# EAGLE board AVR32_PWM_breakout (EAGLE 5.06)
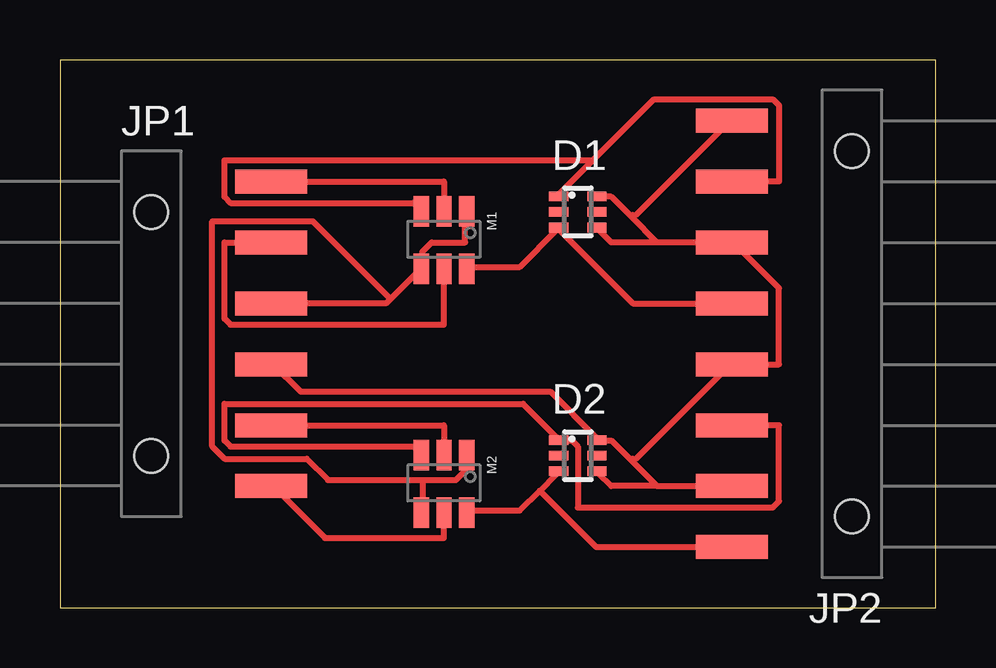
[diagram p0: board, top side]

Size 36.5 x 22.85 mm. Coordinates in mm from the lower left corner, seen from the top.
Outline: 0,0 36.5,0 36.5,22.85 0,22.85 0,0
Copper layers (1*16): Top 0.035mm / dielectric 1.5mm / Bottom 0.035mm
Design rules "Jacob": minimum track width 10mil, minimum drill 20mil, track to track 10mil, track to pad 10mil, pad to pad 10mil, via to via 10mil, smd to smd 10mil, copper to edge 10mil, drill to drill 10mil, minimum pad ring 12mil, minimum via ring 10mil, stop-mask expansion 4mil, vias tented up to drill 25mil, thermal gap 10mil

## Footprints (pad centres in the part's own frame; a part is rotated, then mirrored left to right if it is on the bottom)
SOT-363 = smd 0.4 x 0.8: 1 -0.65,-0.8; 2 0,-0.8; 3 0.65,-0.8; 4 0.65,0.8; 5 0,0.8; 6 -0.65,0.8
1X06-SMD = smd 1 x 3: 1 -6.35,5; 2 -3.81,5; 3 -1.27,5; 4 1.27,5; 5 3.81,5; 6 6.35,5 | hole 1.4: -5.08,0; 5.08,0
1X08-SMD = smd 1 x 3: 1 -6.35,5; 2 -3.81,5; 3 -1.27,5; 4 1.27,5; 5 3.81,5; 6 6.35,5; 7 8.89,5; 8 11.43,5 | hole 1.4: -5.08,0; 10.16,0
SC-74 = smd 0.635 x 1.27: 1 -0.45,-1.3; 2 0.5,-1.3; 3 1.45,-1.3; 4 1.45,1.1; 5 0.5,1.1; 6 -0.45,1.1

## Placement (x,y rotation side)
D1  BAT54JWSOT-363  [SOT-363]  21.59,16.51 270 top
D2  BAT54JWSOT-363  [SOT-363]  21.59,6.35 270 top
JP1  AVR32  [1X06-SMD]  3.81,11.43 270 top
JP2  PWM  [1X08-SMD]  33.02,8.89 90 top
M1  NUD3105DSC-74  [SC-74]  16.51,15.24 180 top
M2  NUD3105DSC-74  [SC-74]  16.51,5.08 180 top

## Library data of the parts
D1 D2 JP1 JP2 M1 M2 = haptic-inu

## Nets
GND: JP1.3 M1.1 M1.4 M2.1 M2.4
MTR1(-): D1.1 JP2.7 M1.3
MTR2(-): D1.3 JP2.5 M1.6
MTR3(-): D2.1 JP2.3 M2.3
MTR4(-): D2.3 JP2.1 M2.6
PWM2(33): JP1.2 M1.5
PWM3(34): JP1.1 M1.2
PWM4(41): JP1.6 M2.5
PWM6(46): JP1.5 M2.2
VDD3.3V: D1.4 D1.6 D2.4 D2.6 JP1.4 JP2.2 JP2.4 JP2.6 JP2.8

## Tracks (layer width: path | path; a pad name or v marks a point on that pad's centre or on a via)
GND
  Top 0.254: 15.11,5.33 15.11,4.06 M2.4 | 15.11,5.33 16.51,5.33 16.89,5.71 16.89,6.35 M2.1 | 13.78,12.89 13.59,12.7 JP1.3 | 13.78,12.89 14.99,14.1 M1.4 15.11,14.22 15.11,14.86 15.49,15.24 16.89,15.24 16.89,16.51 M1.1 | 15.11,5.33 11.18,5.33 10.29,6.22 6.86,6.22 6.35,6.73 6.35,16.13 10.54,16.13 13.78,12.89
MTR1(-)
  Top 0.254: 22.16,18.61 24.77,21.21 29.72,21.21 29.97,20.95 29.97,17.78 JP2.7 | 22.16,18.61 20.83,17.27 D1.1 | M1.3 14.99,16.64 14.73,16.89 7.11,16.89 6.86,17.14 6.86,18.67 22.1,18.67 22.16,18.61
MTR2(-)
  Top 0.254: M1.6 17.02,14.22 19.18,14.22 20.7,15.75 D1.3 20.83,15.75 23.88,12.7 JP2.5
MTR3(-)
  Top 0.254: JP2.3 29.97,7.62 29.97,4.45 29.72,4.19 21.59,4.19 21.59,6.73 21.34,6.99 20.83,6.99 D2.1 20.7,7.11 19.3,8.51 6.86,8.51 6.86,6.99 7.11,6.73 14.73,6.73 14.99,6.48 M2.3
MTR4(-)
  Top 0.254: 20,4.89 19.18,4.06 17.02,4.06 M2.6 | 20,4.89 20.7,5.59 D2.3 | 20,4.89 22.35,2.54 JP2.1
PWM2(33)
  Top 0.254: M1.5 16,14.1 16,11.81 7.11,11.81 6.86,12.06 6.86,15.24 JP1.2
PWM3(34)
  Top 0.254: M1.2 16,16.64 16,17.78 JP1.1
PWM4(41)
  Top 0.254: M2.5 16,3.94 16,2.92 11.05,2.92 8.89,5.08 JP1.6
PWM6(46)
  Top 0.254: M2.2 16,6.48 16,7.62 JP1.5
VDD3.3V
  Top 0.254: 24.89,15.24 22.99,15.24 22.48,15.75 D1.4 | 24.89,15.24 JP2.6 28.07,15.24 29.97,13.34 29.97,10.16 JP2.4 27.94,10.16 24,6.22 23.88,6.22 23.81,6.16 | 24.89,15.24 23.81,16.32 | 23.81,16.32 22.99,17.14 22.48,17.14 D1.6 | JP2.8 27.94,20.32 24,16.38 23.88,16.38 23.81,16.32 | 24.89,5.08 22.99,5.08 22.48,5.59 D2.4 | 24.89,5.08 JP2.2 | 23.81,6.16 24.89,5.08 | 23.81,6.16 22.99,6.99 22.48,6.99 D2.6 22.35,7.11 20.45,9.02 10.03,9.02 8.89,10.16 JP1.4